# Altium PCB Copy of PCB1.pcbdoc
Units mil, origin at the board's own origin, x right, y up, seen from the top; angles counter-clockwise.
Board outline 4231.27 x 2430.02 mil, 2 copper layers (Top Layer, Bottom Layer); 16 components, 11 nets, 239 pads, 16 vias.
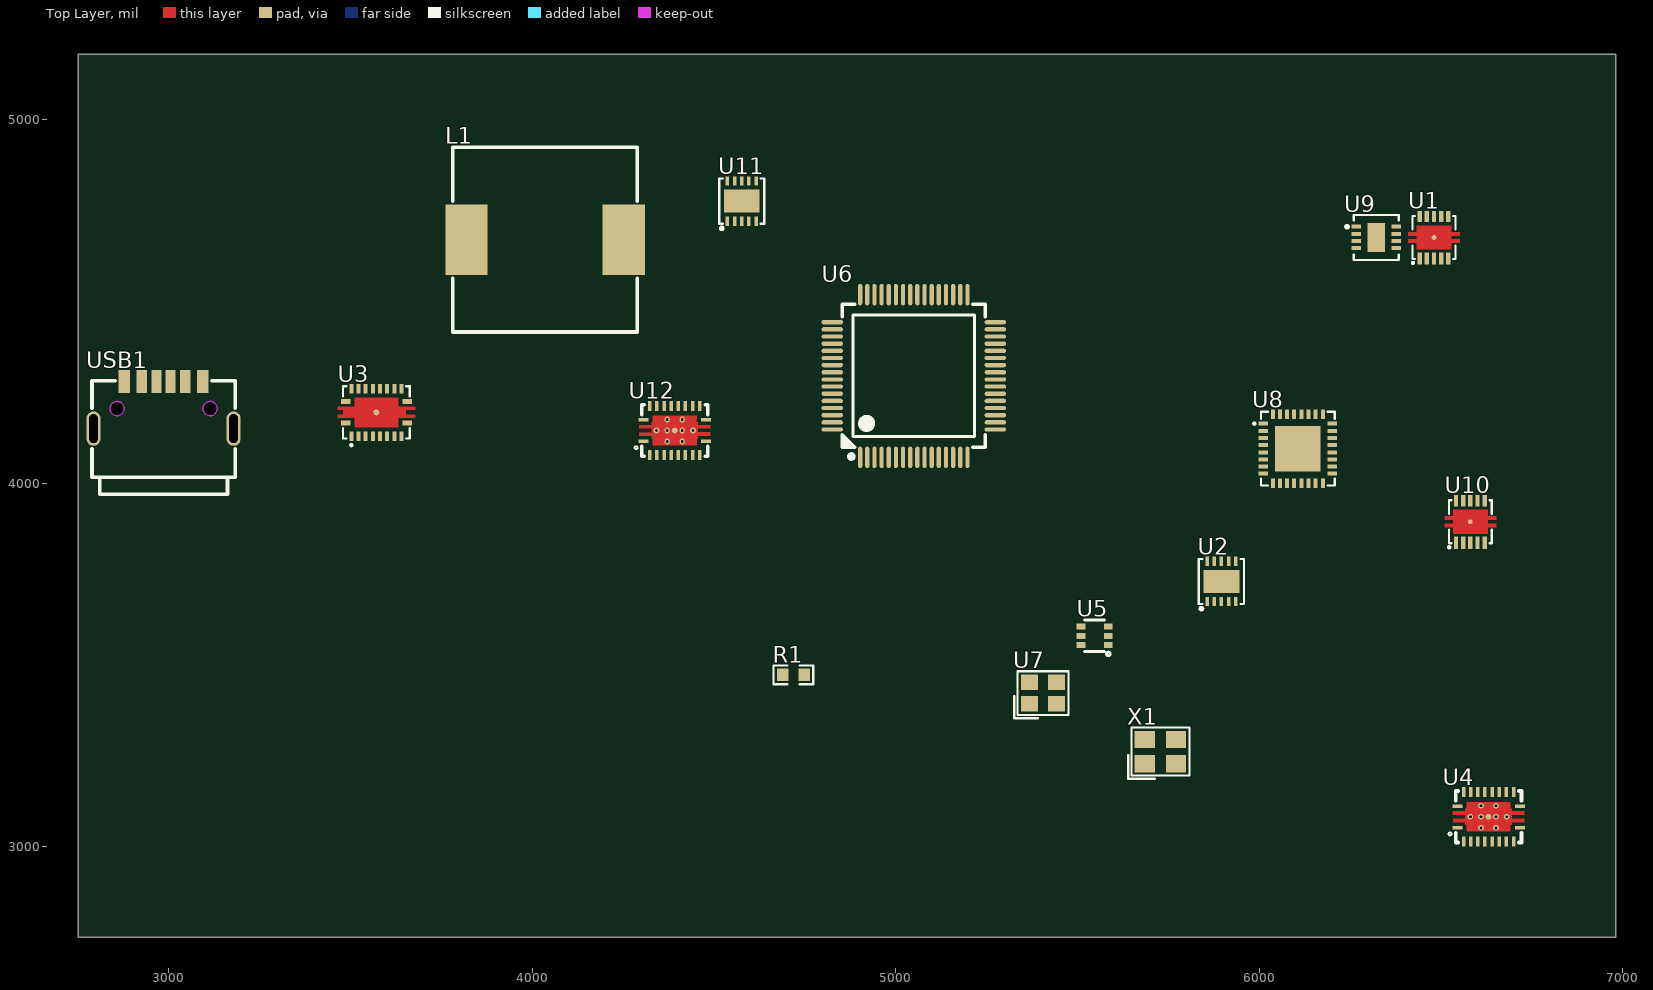
[diagram p0: Top Layer view]
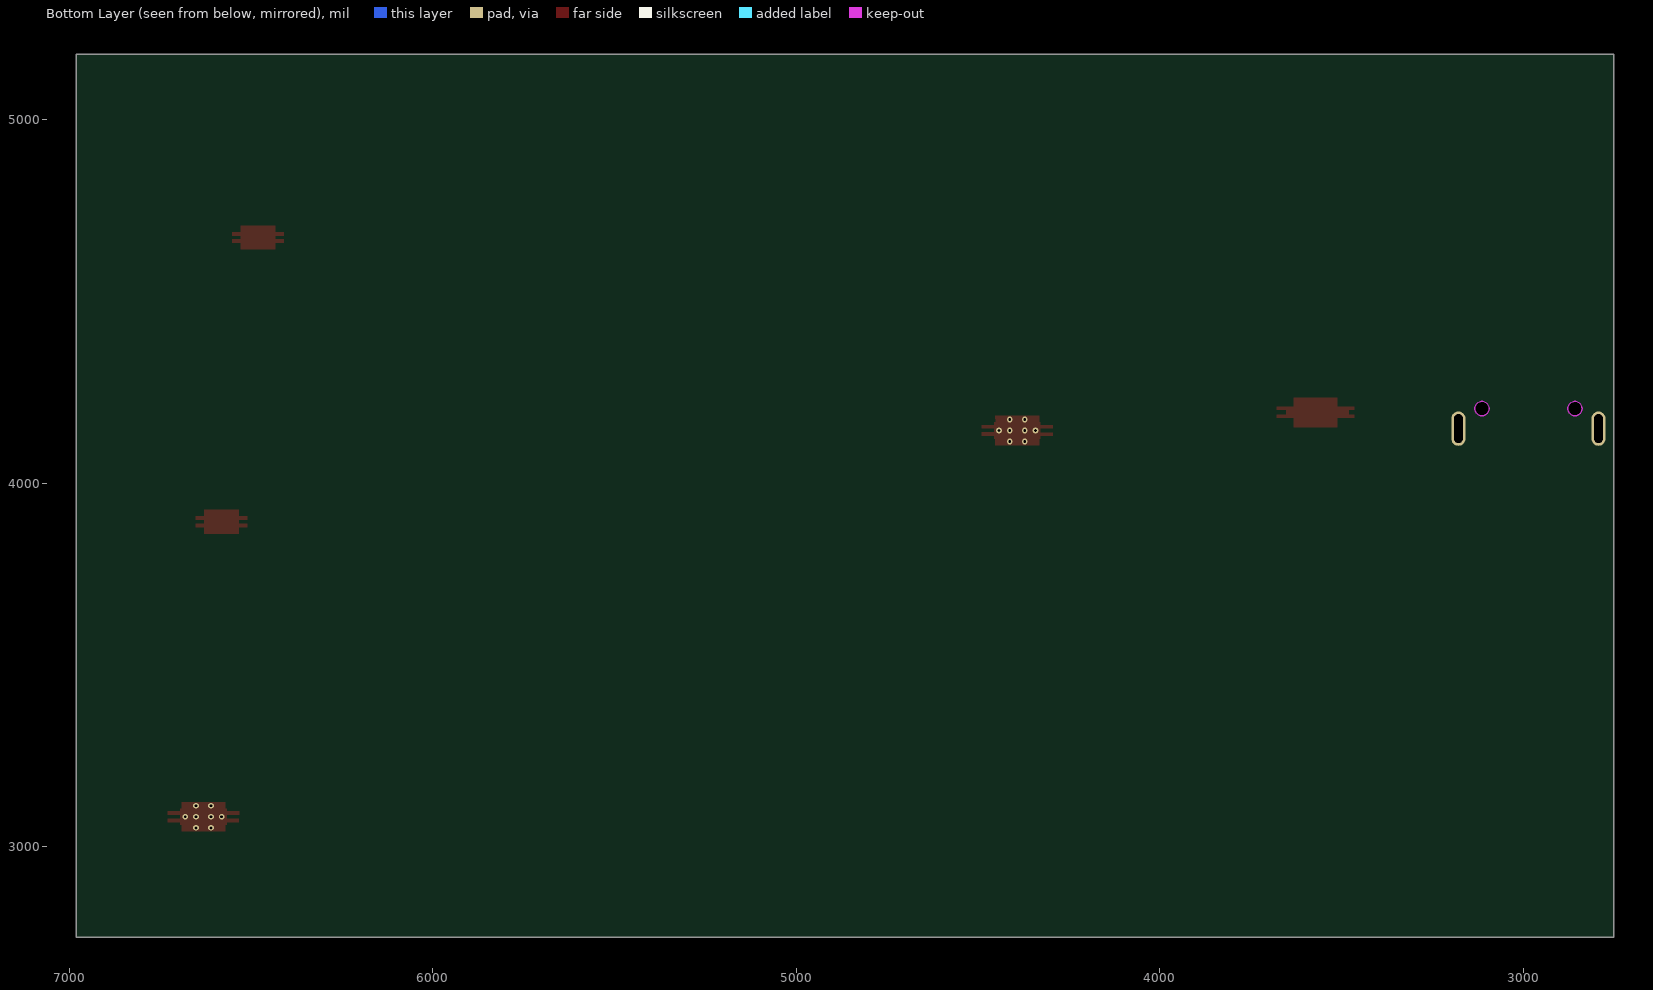
[diagram p1: Bottom Layer view, seen from below]

## Layer stack, top to bottom
Top Solder Mask Layer: solder mask 0.4, Solder Resist, Dk 3.5
Top Layer: signal copper 1.4
Dielectric1: dielectric 12.6, FR-4, Dk 4.8
Bottom Layer: signal copper 1.4
Bottom Solder Mask Layer: solder mask 0.4, Solder Resist, Dk 3.5

## Board outline
6981.27,2750 2750,2750 2750,5180.02 6981.27,5180.02

## Design rules (kind name [scope] priority, off if disabled: settings)
BoardOutlineClearance copperThickness1oz_1 [All] p1: gap=10 ignorepadtopadclearanceinfootprint=FALSE except(0: Arc-SplitContinuation Track-SplitContinuation SMDPad-SplitContinuation THPad-SplitContinuation Via-SplitContinuation Fill-SplitContinuation Poly-SplitContinuation Region-SplitContinuation Text-SplitContinuation; 6: Track-CutoutEdge SMDPad-CutoutEdge THPad-CutoutEdge Via-CutoutEdge Region-CutoutEdge; 11.8: Track-OutlineEdge SMDPad-OutlineEdge THPad-OutlineEdge Via-OutlineEdge Fill-OutlineEdge Fill-CutoutEdge Poly-OutlineEdge Region-OutlineEdge Text-OutlineEdge)
BoardOutlineClearance copperThickness2oz_1 [All] p2: gap=10 ignorepadtopadclearanceinfootprint=FALSE except(0: Arc-SplitContinuation Track-SplitContinuation SMDPad-SplitContinuation THPad-SplitContinuation Via-SplitContinuation Fill-SplitContinuation Poly-SplitContinuation Region-SplitContinuation Text-SplitContinuation; 6: Track-CutoutEdge SMDPad-CutoutEdge THPad-CutoutEdge Via-CutoutEdge Region-CutoutEdge; 11.8: Track-OutlineEdge SMDPad-OutlineEdge THPad-OutlineEdge Via-OutlineEdge Fill-OutlineEdge Fill-CutoutEdge Poly-OutlineEdge Region-OutlineEdge Text-OutlineEdge)
Clearance copperThickness1oz [(InNet('$1N2134') OR InNet('$1N1996') OR InNet('$1N2969') OR InNet('$1N2881') OR InNet('$1N1990') OR InNet('$1N2091') OR InNet('$1N2099') OR InNet('$1N2070') OR InNet('$1N2078') OR InNet('$1N2237') OR InNet('$1N2887'))] p1: gap=6 ignorepadtopadclearanceinfootprint=FALSE except(4: Track-Track; 6.9: Track-Hole SMDPad-Hole THPad-Hole Via-Hole Fill-Hole Poly-Hole Region-Hole Text-Hole; 7: Arc-Arc Arc-Track Arc-SMDPad Arc-THPad Arc-Via Arc-Fill Arc-Poly Arc-Region Arc-Text Arc-Hole; 11.8: Track-Fill Fill-Region)
Clearance copperThickness2oz [All] p2: gap=6 ignorepadtopadclearanceinfootprint=FALSE except(6.9: Track-Hole SMDPad-Hole THPad-Hole Via-Hole Fill-Hole Poly-Hole Region-Hole Text-Hole; 7: Arc-Arc Arc-Track Arc-SMDPad Arc-THPad Arc-Via Arc-Fill Arc-Poly Arc-Region Arc-Text Arc-Hole; 8: Track-Track; 11.8: Track-Fill Fill-Region)
DiffPairsRouting differentialPair [All] p1: maxlimit=6 minlimit=6 mostfreqgap=6 toplayer_minwidth=5 toplayer_maxwidth=100 toplayer_prefwidth=10 bottomlayer_minwidth=5 bottomlayer_maxwidth=100 bottomlayer_prefwidth=10 maxuncoupledlength=10
PasteMaskExpansion pasteMaskExpansion [All] p1: expansion=0
PlaneConnect innerPlane [All] p1: planeconnectstyle=Relief reliefexpansion=20 reliefentries=4 reliefconductorwidth=10 reliefairgap=10
PolygonConnect copperRegion [All] p1: connectstyle=Relief reliefconductorwidth=10 reliefentries=4 polygonreliefangle="90 Angle" airgapwidth=10
RoutingVias viaSize [All] p1: holewidth=12.01 width=24.02 viastyle="Through Hole" minholewidth=11.81 minwidth=19.68 maxholewidth=248.03 maxwidth=393.7
SolderMaskExpansion solderMaskExpansion [All] p1: expansion=2 istentingtop=FALSE useseparateexpansions=TRUE expansionbottom=2 istentingbottom=FALSE
Width copperThickness1oz_2 [All] p1: maxlimit=100 minlimit=5 preferedwidth=10
Width copperThickness2oz_2 [All] p2: maxlimit=100 minlimit=8 preferedwidth=10
27 further rules are at their usual default settings.

## Components (designator, comment, footprint, x,y, rotation, side; value= is the part's Value field where it differs from the comment)
L1 "IHLP5050FDER6R8M8A" IND-SMD_L13.2-W12.9_IHLP5050FDER5R6M01 4035,4670 r0 top
R1 "Res_0603" R0603 4718.56,3472.3 r0 top
U1 "OPA1622IDRCR" VSON-10_L3.0-W3.0-P0.50-BL-EP1.65 6481.47,4676.08 r0 top
U2 "LT3045IDD#PBF" DFN-10_L3.0-W3.0-P0.50-BL-EP-3 5896.26,3729.58 r0 top
U3 "BQ24070RHLR" QFN-20_L4.7-W3.7-P0.50-BL-EP 3570.77,4194.78 r0 top
U4 "TPS61088RHLR" VQFN-20_L4.6-W3.6-P0.50-BL 6631.47,3081.78 r0 top
U5 "NC7SZ157P6X" SC-70-6_L2.0-W1.3-P0.65-LS2.1-BR 5547.26,3579.77 r0 top
U6 "STM32F446RET6" LQFP-64_L10.0-W10.0-P0.50-LS12.0-BL 5049.71,4294.78 r0 top
U7 "NZ2520SB-22.5792MHZ-RNA3046A" OSC-SMD_4P-L2.5-W2.0-BL 5405.34,3422.3 r0 top
U8 "ES9039Q2M_1" QFN-32_L5.0-W5.0-P0.50-TL-EP3.2 6106.58,4094.78 r0 top
U9 "OPA1612AIDRGR" SON-8_L3.0-W3.0-P0.50-TL-EP_OPA1612AIDRGR 6322.42,4676.08 r0 top
U10 "OPA1622IDRCR" VSON-10_L3.0-W3.0-P0.50-BL-EP1.65 6581.47,3893.61 r0 top
U11 "LT3045IDD#PBF" DFN-10_L3.0-W3.0-P0.50-BL-EP-3 4576.29,4776.08 r0 top
U12 "TPS61088RHLR" VQFN-20_L4.6-W3.6-P0.50-BL 4391.75,4144.78 r0 top
USB1 "TYPE-C-31-E-10X" TYPE-C-SMD_TYPE-C-31-E-10X 2985,4215 r0 top
X1 "XTM32024576GT00351001" CRYSTAL-SMD_4P-L3.2-W2.5-BL 5728.65,3261.33 r0 top

## Footprints (in the part's own frame and the unit in brackets; to place one, negate y for a bottom-side part, rotate by r counter-clockwise, add the part's x,y. Pads: shape width x height; smd on the part's side, far side on the other; paste and mask are expansions set on the pad)
CRYSTAL-SMD_4P-L3.2-W2.5-BL [mm]
  rect 1.4x1.2 smd: 1(-1.1,-0.85) 2(1.1,-0.85) 3(1.1,0.85) 4(-1.1,0.85)
  silkscreen extent -2.26,-1.91 2.03,1.68
DFN-10_L3.0-W3.0-P0.50-BL-EP-3 [mm]
  rect 0.25x0.65 smd: 1(-1,-1.411) 2(-0.5,-1.411) 3(0,-1.411) 4(0.5,-1.411) 5(1,-1.411) 6(1,1.411) 7(0.5,1.411) 8(0,1.411) 9(-0.5,1.411) 10(-1,1.411)
  rect 2.5x1.6 smd: 11(0,0)
  silkscreen extent -1.58,-2 1.58,1.58
IND-SMD_L13.2-W12.9_IHLP5050FDER5R6M01 [mm]
  rect 2.95x4.95 smd: 1(-5.5,0) 2(5.5,0)
  silkscreen extent -6.45,-6.45 6.45,6.45
LQFP-64_L10.0-W10.0-P0.50-LS12.0-BL [mm]
  oval 0.3x1.5 smd: 1(-3.75,-5.688) 2(-3.25,-5.688) 3(-2.75,-5.688) 4(-2.25,-5.688) 5(-1.75,-5.688) 6(-1.25,-5.688) 7(-0.75,-5.688) 8(-0.25,-5.688) 9(0.25,-5.688) 10(0.75,-5.688) 11(1.25,-5.688) 12(1.75,-5.688) 13(2.25,-5.688) 14(2.75,-5.688) 15(3.25,-5.688) 16(3.75,-5.688) 33(3.75,5.688) 34(3.25,5.688) 35(2.75,5.688) 36(2.25,5.688) 37(1.75,5.688) 38(1.25,5.688) 39(0.75,5.688) 40(0.25,5.688) 41(-0.25,5.688) 42(-0.75,5.688) 43(-1.25,5.688) 44(-1.75,5.688) 45(-2.25,5.688) 46(-2.75,5.688) 47(-3.25,5.688) 48(-3.75,5.688)
  oval 1.5x0.3 smd: 17(5.7,-3.738) 18(5.7,-3.238) 19(5.7,-2.738) 20(5.7,-2.238) 21(5.7,-1.738) 22(5.7,-1.238) 23(5.7,-0.738) 24(5.7,-0.238) 25(5.7,0.262) 26(5.7,0.762) 27(5.7,1.262) 28(5.7,1.762) 29(5.7,2.262) 30(5.7,2.762) 31(5.7,3.262) 32(5.7,3.762) 49(-5.7,3.762) 50(-5.7,3.262) 51(-5.7,2.762) 52(-5.7,2.262) 53(-5.7,1.762) 54(-5.7,1.262) 55(-5.7,0.762) 56(-5.7,0.262) 57(-5.7,-0.238) 58(-5.7,-0.738) 59(-5.7,-1.238) 60(-5.7,-1.738) 61(-5.7,-2.238) 62(-5.7,-2.738) 63(-5.7,-3.238) 64(-5.7,-3.738)
  silkscreen extent -5,-5.78 5,5.01
OSC-SMD_4P-L2.5-W2.0-BL [mm]
  rect 1.2x1.1 smd: 1(-0.95,-0.75) 2(0.95,-0.75) 3(0.95,0.75) 4(-0.95,0.75)
  silkscreen extent -2.01,-1.76 1.78,1.53
QFN-20_L4.7-W3.7-P0.50-BL-EP [mm]
  rect 0.665x0.336 smd: 1(-2.157,-0.75) 10(2.157,-0.75) 11(2.157,0.75) 20(-2.157,0.75)
  rect 0.28x0.665 smd: 2(-1.75,-1.657) 3(-1.25,-1.657) 4(-0.75,-1.657) 5(-0.25,-1.657) 6(0.25,-1.657) 7(0.75,-1.657) 8(1.25,-1.657) 9(1.75,-1.657) 12(1.75,1.658) 13(1.25,1.658) 14(0.75,1.658) 15(0.25,1.658) 16(-0.25,1.658) 17(-0.75,1.658) 18(-1.25,1.658) 19(-1.75,1.658)
  round 0.41 smd: 21(0,0)
  Top Layer region: -2.705,0.38 -2.705,0.175 -2.315,0.175 -2.315,-0.175 -2.705,-0.175 -2.705,-0.375 -1.525,-0.375 -1.525,-1.025 1.525,-1.025 1.525,-0.375 2.705,-0.375 2.705,-0.175 2.065,-0.175 2.065,0.175 2.705,0.175 2.705,0.375 1.525,0.375 1.525,1.025 -1.525,1.025 -1.525,0.375 -2.705,0.38
  silkscreen extent -2.33,-2.37 2.33,1.83
QFN-32_L5.0-W5.0-P0.50-TL-EP3.2 [mm]
  rect 0.665x0.28 smd paste-100 mask+0.051: 1(-2.407,1.75) 2(-2.407,1.25) 3(-2.407,0.75) 4(-2.407,0.25) 5(-2.407,-0.25) 6(-2.407,-0.75) 7(-2.407,-1.25) 8(-2.407,-1.75) 17(2.407,-1.75) 18(2.407,-1.25) 19(2.407,-0.75) 20(2.407,-0.25) 21(2.407,0.25) 22(2.407,0.75) 23(2.407,1.25) 24(2.407,1.75)
  rect 0.28x0.665 smd paste-100 mask+0.051: 9(-1.75,-2.407) 10(-1.25,-2.407) 11(-0.75,-2.407) 12(-0.25,-2.407) 13(0.25,-2.407) 14(0.75,-2.407) 15(1.25,-2.407) 16(1.75,-2.407) 25(1.75,2.407) 26(1.25,2.407) 27(0.75,2.407) 28(0.25,2.407) 29(-0.25,2.407) 30(-0.75,2.407) 31(-1.25,2.407) 32(-1.75,2.407)
  rect 3.2x3.2 smd paste-100 mask+0.051: 33(0,0)
  silkscreen extent -3.11,-2.58 2.58,2.58
R0603 [mil]
  rect 31.75x34.02 smd paste-3937.01 mask+2: 1(-29.66,0) 2(29.66,0)
  silkscreen extent -55,-26 55,26
SC-70-6_L2.0-W1.3-P0.65-LS2.1-BR [mm]
  rect 0.6x0.42 smd: 1(0.95,-0.65) 2(0.95,0) 3(0.95,0.65) 4(-0.95,0.65) 5(-0.95,0) 6(-0.95,-0.65)
  silkscreen extent -0.7,-1.39 1.09,1.1
SON-8_L3.0-W3.0-P0.50-TL-EP_OPA1612AIDRGR [mm]
  rect 0.665x0.28 smd: 1(-1.407,0.75) 2(-1.407,0.25) 3(-1.407,-0.25) 4(-1.407,-0.75) 5(1.407,-0.75) 6(1.407,-0.25) 7(1.407,0.25) 8(1.407,0.75)
  rect 1.2x2 smd: 9(0,0)
  silkscreen extent -2.14,-1.58 1.58,1.58
TYPE-C-SMD_TYPE-C-31-E-10X [mm]
  oval 1x2.4 hole 0.6 slot 2 at 90 deg copper offset 0,0: 7(4.895,-1.65)
  oval 1x2.4 hole 0.6 slot 2 at 90 deg: 8(-4.895,-1.65)
  rect 0.8x1.6 smd paste-100 mask+0.051: C1(-2.75,1.65) C6(2.75,1.65)
  rect 0.76x1.6 smd paste-100 mask+0.051: C2(-1.52,1.65) C5(1.52,1.65)
  rect 0.7x1.6 smd paste-100 mask+0.051: C3(-0.5,1.65) C4(0.5,1.65)
  Board Outline Layer board cut-out: -2.75,-0.25 -2.799,-0.467 -2.938,-0.641 -3.139,-0.737 -3.361,-0.737 -3.562,-0.641 -3.7,-0.467 -3.75,-0.25 -3.75,-0.25 -3.7,-0.033 -3.562,0.141 -3.361,0.238 -3.139,0.238 -2.938,0.141 -2.799,-0.033 -2.75,-0.25 -2.75,-0.25
  Board Outline Layer board cut-out: 3.75,-0.25 3.7,-0.467 3.562,-0.641 3.361,-0.737 3.139,-0.737 2.938,-0.641 2.799,-0.467 2.75,-0.25 2.75,-0.25 2.799,-0.033 2.938,0.141 3.139,0.238 3.361,0.238 3.562,0.141 3.7,-0.033 3.75,-0.25 3.75,-0.25
  Board Outline Layer circle w0.005: c-3.25,-0.25 r0.5
  Board Outline Layer circle w0.005: c3.25,-0.25 r0.5
  Board Outline Layer region: -2.75,-0.25 -2.799,-0.467 -2.938,-0.641 -3.139,-0.737 -3.361,-0.737 -3.562,-0.641 -3.7,-0.467 -3.75,-0.25 -3.75,-0.25 -3.7,-0.033 -3.562,0.141 -3.361,0.238 -3.139,0.238 -2.938,0.141 -2.799,-0.033 -2.75,-0.25 -2.75,-0.25
  Board Outline Layer region: 3.75,-0.25 3.7,-0.467 3.562,-0.641 3.361,-0.737 3.139,-0.737 2.938,-0.641 2.799,-0.467 2.75,-0.25 2.75,-0.25 2.799,-0.033 2.938,0.141 3.139,0.238 3.361,0.238 3.562,0.141 3.7,-0.033 3.75,-0.25 3.75,-0.25
  silkscreen extent -5,-6.25 5,1.69
VQFN-20_L4.6-W3.6-P0.50-BL [mm]
  rect 0.7x0.244 smd paste+0 mask+0.05: 1(-2.185,-0.75) 10(2.185,-0.75) 11(2.185,0.75) 20(-2.185,0.75)
  rect 0.244x0.7 smd paste+0 mask+0.05: 2(-1.748,-1.727) 3(-1.248,-1.727) 4(-0.748,-1.727) 5(-0.248,-1.727) 6(0.252,-1.727) 7(0.752,-1.727) 8(1.252,-1.727) 9(1.752,-1.727) 12(1.752,1.727) 13(1.252,1.727) 14(0.752,1.727) 15(0.252,1.727) 16(-0.248,1.727) 17(-0.748,1.727) 18(-1.248,1.727) 19(-1.748,1.727)
  round 0.406 smd: 21(0,0.001)
  Top Layer region: -1.621,0.143 -2.485,0.146 -2.485,0.376 -1.621,0.38 -1.618,0.565 -1.522,0.566 -1.521,1.016 1.526,1.016 1.523,0.571 1.621,0.571 1.624,0.381 2.485,0.381 2.485,0.147 1.621,0.147 1.624,-0.137 2.485,-0.137 2.485,-0.371 1.621,-0.371 1.624,-0.561 1.526,-0.561 1.526,-1.014 -1.522,-1.016 -1.522,-0.567 -1.62,-0.567 -1.619,-0.374 -2.481,-0.374 -2.48,-0.143 -1.618,-0.144 -1.619,0.145 -1.621,0.143
  silkscreen extent -2.8,-1.8 2.3,1.8
VSON-10_L3.0-W3.0-P0.50-BL-EP1.65 [mm]
  rect 0.3x0.85 smd: 1(-1,-1.467) 2(-0.5,-1.467) 3(0,-1.467) 4(0.5,-1.467) 5(1,-1.467)
  rect 0.3x0.8 smd: 6(1,1.467) 7(0.5,1.467) 8(0,1.467) 9(-0.5,1.467) 10(-1,1.467)
  round 0.33 smd: 11(0,0)
  Top Layer region: -1.2,-0.773 -1.2,-0.375 -1.8,-0.375 -1.8,-0.125 -1.2,-0.125 -1.2,0.125 -1.8,0.125 -1.8,0.375 -1.2,0.375 -1.2,0.825 1.2,0.825 1.2,0.375 1.8,0.375 1.8,0.125 1.2,0.125 1.2,-0.125 1.8,-0.125 1.8,-0.375 1.2,-0.375 1.2,-0.825 -1.2,-0.825 -1.2,-0.773
  silkscreen extent -1.55,-1.85 1.5,1.5

## Via types
v1: diameter 15.75, hole 7.87, Top Layer to Bottom Layer, 16 vias

## Nets (pads, with @x,y where several pads share a name; then routed paths per layer and width w, separated by ;. In a path a pad name is that pad's centre, name@x,y a point inside that pad or via, vN(x,y) a via of type N, cw(c..) or ccw(c..) an arc to the next point about the centre after c; other vN are vias at no path point)
$1N1990: U3.4 USB1.C2
$1N1996: U3.8 U3.9 U3.19 U3.20 U11.8 U12.13 USB1.C1 USB1.C6
$1N2070: U5.3 U7.3
$1N2078: U5.1 X1.3
$1N2091: U5.6 U6.39
$1N2099: U5.4 U8.32
$1N2134: R1.2 U7.1
$1N2237: U6.32 U11.10
$1N2881: U3.15 U12.1
$1N2887: U11.1 U12.15
$1N2969: U3.16 U12.9
pads on no net: L1.1 L1.2 R1.1 U1.1 U1.2 U1.3 U1.4 U1.5 U1.6 U1.7 U1.8 U1.9 U1.10 U1.11 U2.1 U2.2 U2.3 U2.4 U2.5 U2.6 U2.7 U2.8 U2.9 U2.10 U2.11 U3.1 U3.2 U3.3 U3.5 U3.6 U3.7 U3.10 U3.11 U3.12 U3.13 U3.14 U3.17 U3.18 U3.21 U4.1 U4.2 U4.3 U4.4 U4.5 U4.6 U4.7 U4.8 U4.9 U4.10 U4.11 U4.12 U4.13 U4.14 U4.15 U4.16 U4.17 U4.18 U4.19 U4.20 U4.21 U5.2 U5.5 U6.1 U6.2 U6.3 U6.4 U6.5 U6.6 U6.7 U6.8 U6.9 U6.10 U6.11 U6.12 U6.13 U6.14 U6.15 U6.16 U6.17 U6.18 U6.19 U6.20 U6.21 U6.22 U6.23 U6.24 U6.25 U6.26 U6.27 U6.28 U6.29 U6.30 U6.31 U6.33 U6.34 U6.35 U6.36 U6.37 U6.38 U6.40 U6.41 U6.42 U6.43 U6.44 U6.45 U6.46 U6.47 U6.48 U6.49 U6.50 U6.51 U6.52 U6.53 U6.54 U6.55 U6.56 U6.57 U6.58 U6.59 U6.60 U6.61 U6.62 U6.63 U6.64 U7.2 U7.4 U8.1 U8.2 U8.3 U8.4 U8.5 U8.6 U8.7 U8.8 U8.9 U8.10 U8.11 U8.12 U8.13 U8.14 U8.15 U8.16 U8.17 U8.18 U8.19 U8.20 U8.21 U8.22 U8.23 U8.24 U8.25 U8.26 U8.27 U8.28 U8.29 U8.30 U8.31 U8.33 U9.1 U9.2 U9.3 U9.4 U9.5 U9.6 U9.7 U9.8 U9.9 U10.1 U10.2 U10.3 U10.4 U10.5 U10.6 U10.7 U10.8 U10.9 U10.10 U10.11 U11.2 U11.3 U11.4 U11.5 U11.6 U11.7 U11.9 U11.11 U12.2 U12.3 U12.4 U12.5 U12.6 U12.7 U12.8 U12.10 U12.11 U12.12 U12.14 U12.16 U12.17 U12.18 U12.19 U12.20 U12.21 USB1.7 USB1.8 USB1.C3 USB1.C4 USB1.C5 X1.1 X1.2 X1.4
copper on no net:
  other v1: 6610.88,3051.27 6652.22,3051.27 6581.35,3081.78 6610.88,3081.78 6652.22,3081.78 6681.75,3081.78 6610.88,3112.29 6652.22,3112.29 4371.15,4114.27 4412.49,4114.27 4341.62,4144.78 4371.15,4144.78 4412.49,4144.78 4442.02,4144.78 4371.15,4175.29 4412.49,4175.29